# Altium PCB main_board.PcbDoc
Units mm, origin at the board's own origin, x right, y up, seen from the top; angles counter-clockwise.
Board outline 102 x 102 mm, 2 copper layers (Top Layer, Bottom Layer); 1 components, 1 nets, 64 pads, 0 vias.
Unrouted connection lines stored in the file: 1.
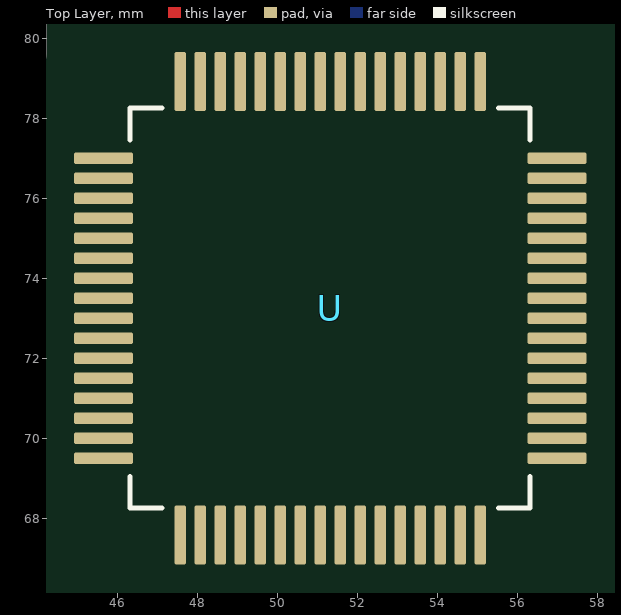
[diagram p0: Top Layer view]
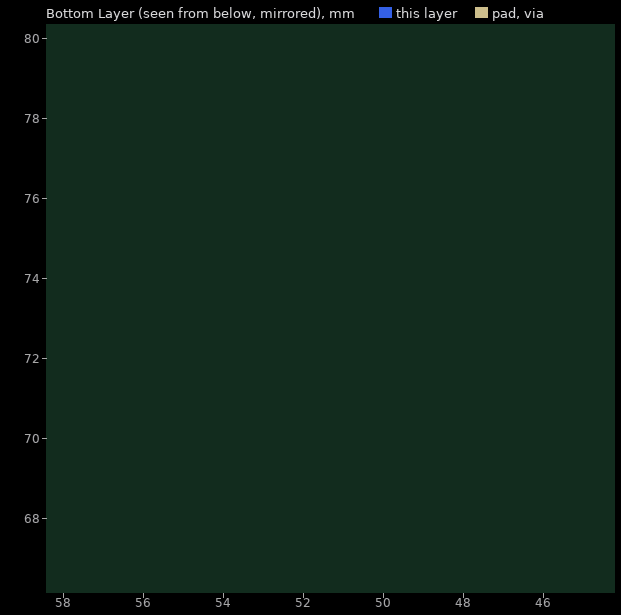
[diagram p1: Bottom Layer view, seen from below]

## Layer stack, top to bottom
Top Solder: solder mask 0.0102, Solder Resist, Dk 3.5
Top Layer: signal copper 0.0356
Dielectric 1: dielectric 0.32, FR-4, Dk 4.8
Bottom Layer: signal copper 0.0356
Bottom Solder: solder mask 0.0102, Solder Resist, Dk 3.5

## Board outline
0,132 102,132 102,30 0,30

## Design rules (kind name [scope] priority, off if disabled: settings)
Clearance [All] p1: gap=0.254 ignorepadtopadclearanceinfootprint=FALSE except(0: Arc-Hole Track-Hole SMDPad-Hole THPad-Hole Via-Hole Fill-Hole Poly-Hole Region-Hole Text-Hole)
PolygonConnect [All] p1: connectstyle=Relief reliefconductorwidth=0.254 reliefentries=4 polygonreliefangle="90 Angle" airgapwidth=0.254
RoomDefinition microcontroller [InComponentClass('microcontroller')] p1: confinementstyle=ConfineIn formatcopy=TRUE lockcomponents=FALSE outline 178.943,26.924 194.691,26.924 194.691,41.529 178.943,41.529
RoutingVias [All] p1: holewidth=0.711 width=1.27 viastyle="Through Hole" minholewidth=0.711 minwidth=1.27 maxholewidth=0.711 maxwidth=1.27
SolderMaskExpansion [All] p1: expansion=0.102 istentingtop=FALSE
Width [All] p1: maxlimit=0.254 minlimit=0.254 preferedwidth=0.254
30 further rules are at their usual default settings.

## Components (designator, comment, footprint, x,y, rotation, side; value= is the part's Value field where it differs from the comment)
U "STM32G070RBT6" STM32 51.561,73.282 r270 top

## Footprints (in the part's own frame and the unit in brackets; to place one, negate y for a bottom-side part, rotate by r counter-clockwise, add the part's x,y. Pads: shape width x height; smd on the part's side, far side on the other; paste and mask are expansions set on the pad)
STM32 [mm]
  rrect25% 1.47x0.28 smd: 1(-5.638,3.519) 2(-5.638,3.019) 3(-5.638,2.519) 4(-5.638,2.019) 5(-5.638,1.519) 6(-5.638,1.019) 7(-5.638,0.519) 8(-5.638,0.019) 9(-5.638,-0.481) 10(-5.638,-0.981) 11(-5.638,-1.481) 12(-5.638,-1.981) 13(-5.638,-2.481) 14(-5.638,-2.981) 15(-5.638,-3.481) 16(-5.638,-3.981) 33(5.702,-3.981) 34(5.702,-3.481) 35(5.702,-2.981) 36(5.702,-2.481) 37(5.702,-1.981) 38(5.702,-1.481) 39(5.702,-0.981) 40(5.702,-0.481) 41(5.702,0.019) 42(5.702,0.519) 43(5.702,1.019) 44(5.702,1.519) 45(5.702,2.019) 46(5.702,2.519) 47(5.702,3.019) 48(5.702,3.519)
  rrect25% 0.28x1.47 smd: 17(-3.718,-5.901) 18(-3.218,-5.901) 19(-2.718,-5.901) 20(-2.218,-5.901) 21(-1.718,-5.901) 22(-1.218,-5.901) 23(-0.718,-5.901) 24(-0.218,-5.901) 25(0.282,-5.901) 26(0.782,-5.901) 27(1.282,-5.901) 28(1.782,-5.901) 29(2.282,-5.901) 30(2.782,-5.901) 31(3.282,-5.901) 32(3.782,-5.901) 49(3.782,5.439) 50(3.282,5.439) 51(2.782,5.439) 52(2.282,5.439) 53(1.782,5.439) 54(1.282,5.439) 55(0.782,5.439) 56(0.282,5.439) 57(-0.218,5.439) 58(-0.718,5.439) 59(-1.218,5.439) 60(-1.718,5.439) 61(-2.218,5.439) 62(-2.718,5.439) 63(-3.218,5.439) 64(-3.718,5.439)
  silkscreen extent -7.41,-5.23 5.03,4.77

## Part data
U: "ARMÂ® CortexÂ®-M0+ STM32G0 Microcontroller IC 32-Bit 64MHz 128KB _128K x 8_ FLASH 64-LQFP _10x10_", Package="LQFP-64 STMicroelectronics", Availability=Unavailable, MF=STMicroelectronics, MP=STM32G070RBT6, Price=None, SnapEDA_Link=https://www.snapeda.com/parts/STM32G070RBT6/STMicroelectronics/view-part/3616430/?ref=snap

## Nets (pads, with @x,y where several pads share a name; then routed paths per layer and width w, separated by ;. In a path a pad name is that pad's centre, name@x,y a point inside that pad or via, vN(x,y) a via of type N, cw(c..) or ccw(c..) an arc to the next point about the centre after c; other vN are vias at no path point)
NetU_17: U.17 U.21
pads on no net: U.1 U.2 U.3 U.4 U.5 U.6 U.7 U.8 U.9 U.10 U.11 U.12 U.13 U.14 U.15 U.16 U.18 U.19 U.20 U.22 U.23 U.24 U.25 U.26 U.27 U.28 U.29 U.30 U.31 U.32 U.33 U.34 U.35 U.36 U.37 U.38 U.39 U.40 U.41 U.42 U.43 U.44 U.45 U.46 U.47 U.48 U.49 U.50 U.51 U.52 U.53 U.54 U.55 U.56 U.57 U.58 U.59 U.60 U.61 U.62 U.63 U.64